# Altium PCB DCDC_Motherbord.PcbDoc
Units mm, origin at the board's own origin, x right, y up, seen from the top; angles counter-clockwise.
Board outline 50 x 50 mm, 2 copper layers (Top Layer, Bottom Layer); 3 components, 16 nets, 39 pads, 0 vias.
Unrouted connection lines stored in the file: 16.
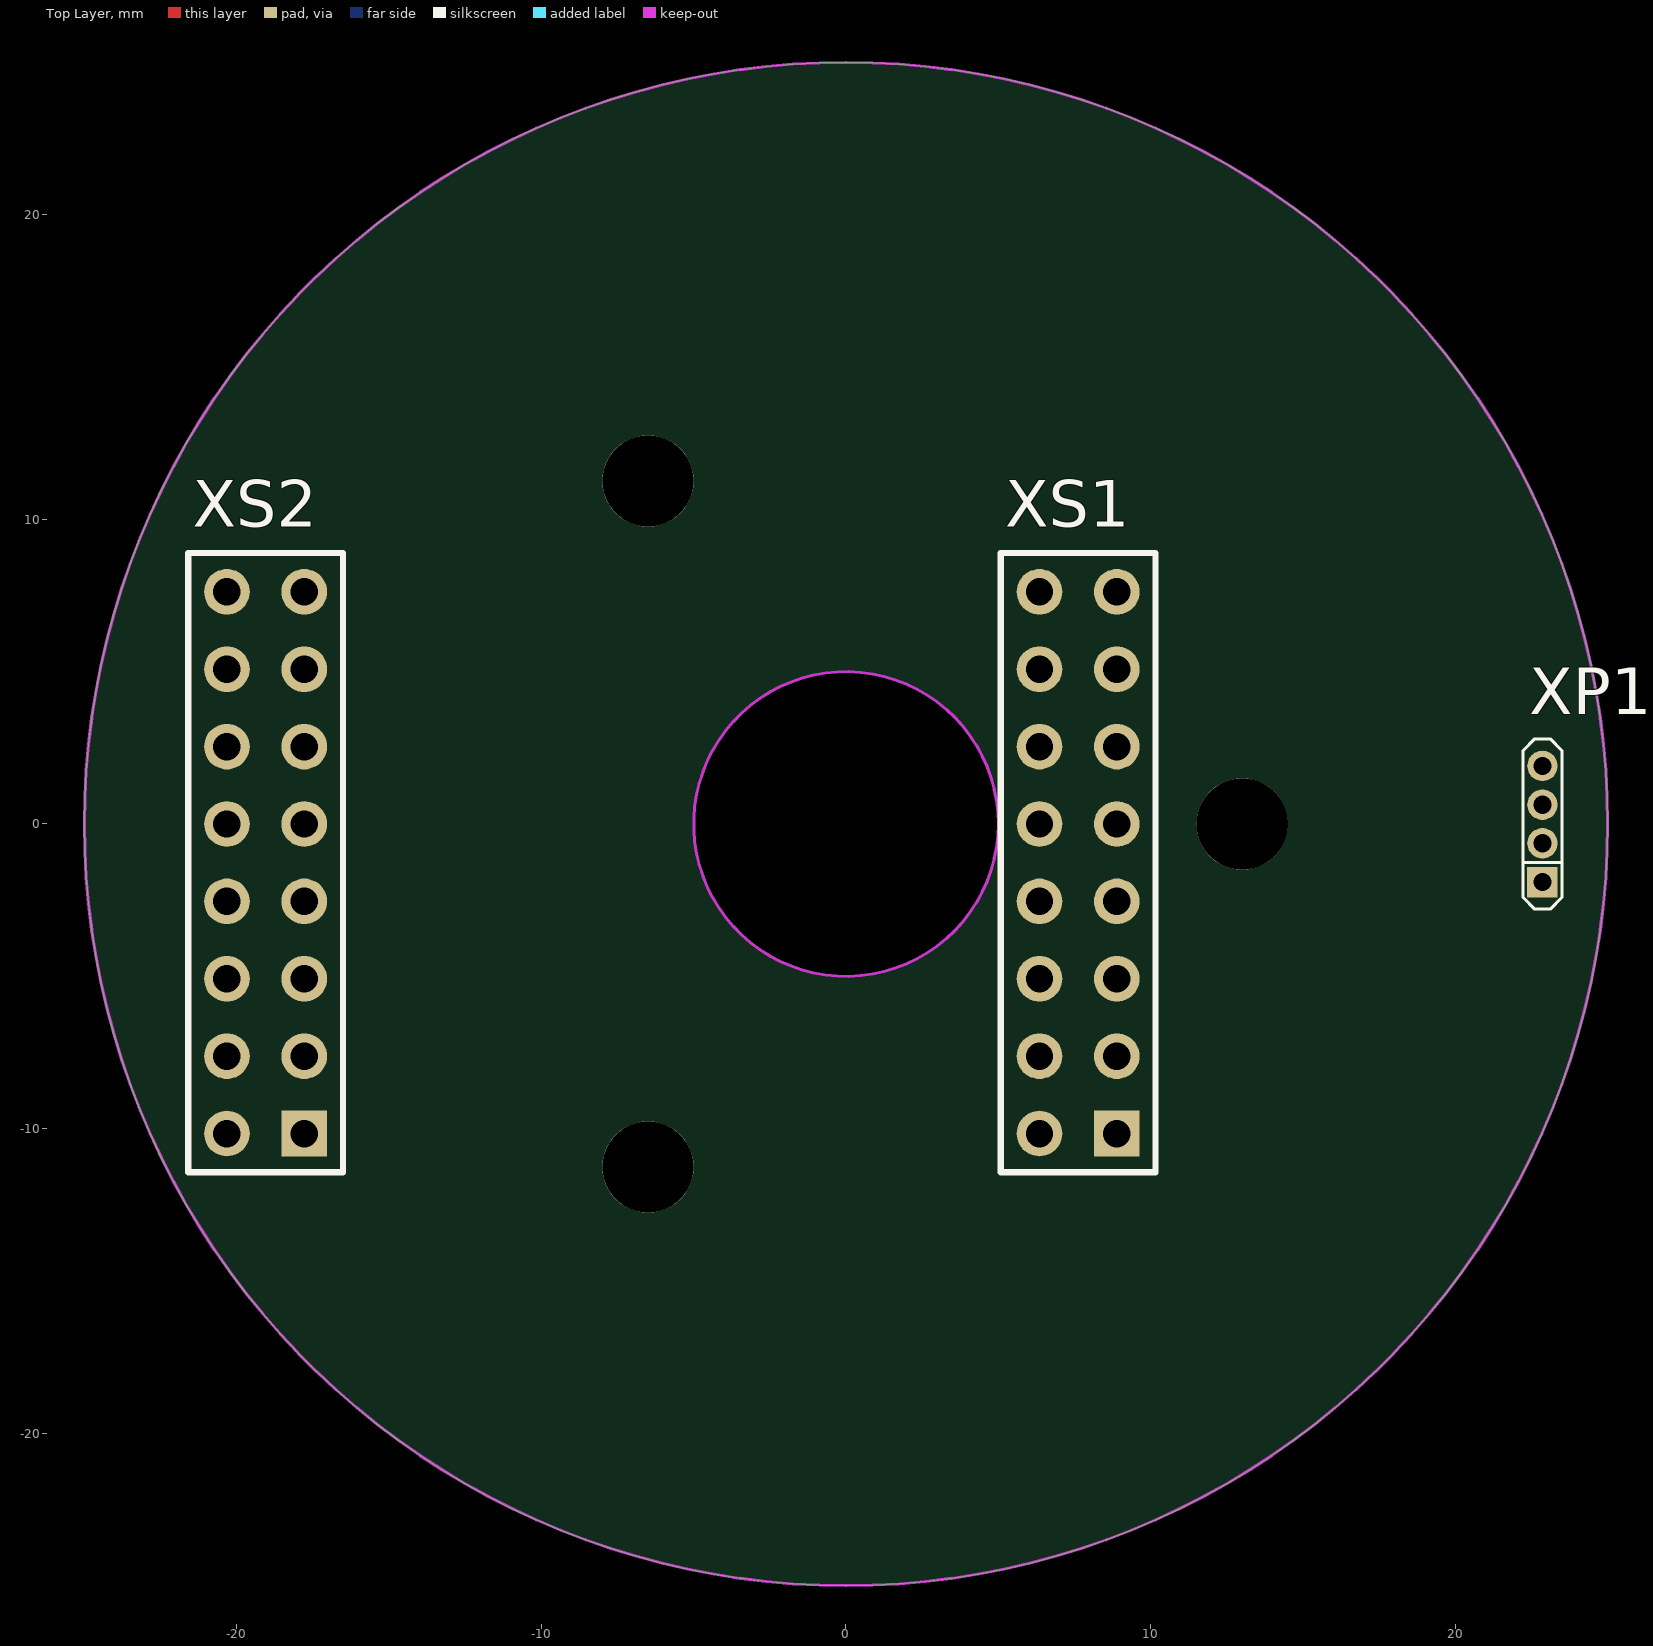
[diagram p0: Top Layer view]
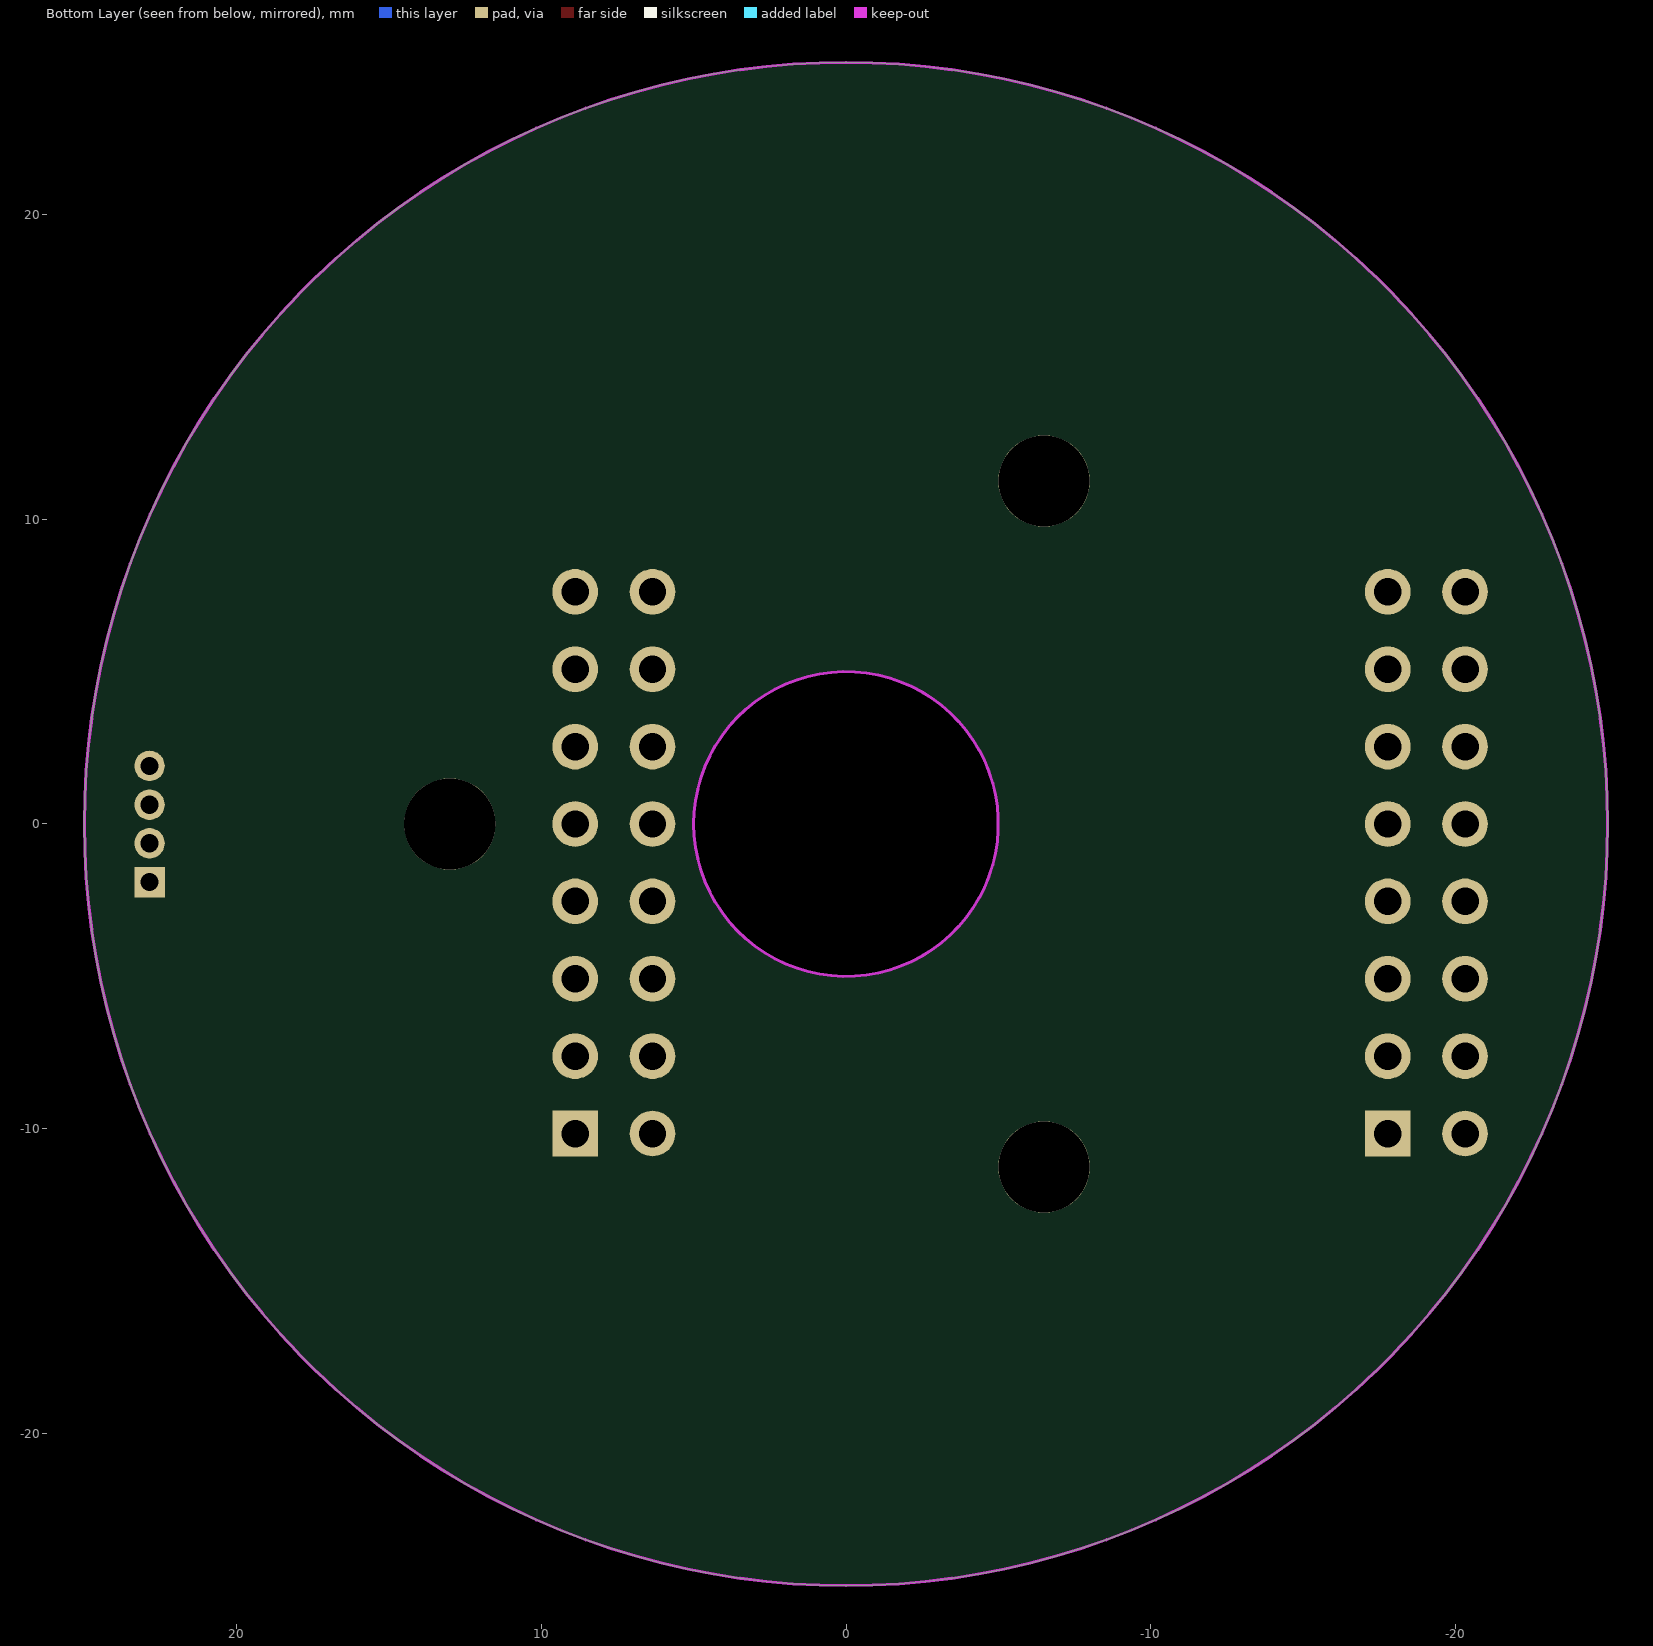
[diagram p1: Bottom Layer view, seen from below]

## Layer stack, top to bottom
Top Solder: solder mask 0.0102, Solder Resist, Dk 3.5
Top Layer: signal copper 0.0356
Dielectric 1: dielectric 0.32, FR-4, Dk 4.8
Bottom Layer: signal copper 0.0356
Bottom Solder: solder mask 0.0102, Solder Resist, Dk 3.5

## Board outline
-25,0 ccw(c0,0) 0,-25 ccw(c0,0) 25,0 ccw(c0,0) 0,25 ccw(c0,0)
cut-out: -5,0 ccw(c0,0) 0,-5 ccw(c0,0) 5,0 ccw(c0,0) 0,5 ccw(c0,0)

## Design rules (kind name [scope] priority, off if disabled: settings)
Clearance [All] p1: gap=0.254 ignorepadtopadclearanceinfootprint=FALSE except(0: Arc-Hole Track-Hole SMDPad-Hole THPad-Hole Via-Hole Fill-Hole Poly-Hole Region-Hole Text-Hole)
PolygonConnect [All] p1: connectstyle=Relief reliefconductorwidth=0.254 reliefentries=4 polygonreliefangle="90 Angle" airgapwidth=0.254
RoutingVias [All] p1: holewidth=0.711 width=1.27 viastyle="Through Hole" minholewidth=0.711 minwidth=1.27 maxholewidth=0.711 maxwidth=1.27
SolderMaskExpansion [All] p1: expansion=0.102 istentingtop=FALSE
Width [All] p1: maxlimit=0.254 minlimit=0.254 preferedwidth=0.254
30 further rules are at their usual default settings.

## Components (designator, comment, footprint, x,y, rotation, side; value= is the part's Value field where it differs from the comment)
XP1 "PLS1.27-4" PLLS1.27-4 22.86,-1.905 r0 top
XS1 "PBD-16" PBD-16-3D 8.89,-10.16 r90 top
XS2 "PBD-16" PBD-16-3D -17.78,-10.16 r90 top

## Footprints (in the part's own frame and the unit in brackets; to place one, negate y for a bottom-side part, rotate by r counter-clockwise, add the part's x,y. Pads: shape width x height; smd on the part's side, far side on the other; paste and mask are expansions set on the pad)
PBD-16-3D [mm] "Connector; Header; 8x2 Position"
  rect 1.5x1.5 hole 0.9: 1(0,0)
  round 1.5 hole 0.9: 2(0,2.54) 3(2.54,0) 4(2.54,2.54) 5(5.08,0) 6(5.08,2.54) 7(7.62,0) 8(7.62,2.54) 9(10.16,0) 10(10.16,2.54) 11(12.7,0) 12(12.7,2.54) 13(15.24,0) 14(15.24,2.54) 15(17.78,0) 16(17.78,2.54)
  silkscreen extent -1.27,-1.27 19.05,3.81, body extent -1.27,-1.27 19.05,3.81, height 8.5
PLLS1.27-4 [mm]
  rect 1x1 hole 0.6: 1(0,0)
  round 1 hole 0.6: 2(0,1.27) 3(0,2.54) 4(0,3.81)
  silkscreen extent -0.64,-0.89 0.64,4.7

## Part data
XS1 XS2: library part SH2-16G, "CONN RCPT 16POS 0.1 GOLD PCB", Digi-Key Part Number=ED3071-ND, Package="Socket 16POS 2.54mm", HelpURL=https://www.digikey.com/en/products/detail/on-shore-technology-inc/SH2-16G/2721215, Manufacturer Part Number=SH2-16G, Part Number=SH2-16G, Price$=0.20250
  XS1: System=Connector
XP1: Part Number=PLS1.27-4, System=Connector

## Free pads (board coordinates)
  round 3 hole 3: 0(-6.5,11.258) 1(-6.5,-11.258) 2(13,0)

## Nets (pads, with @x,y where several pads share a name; then routed paths per layer and width w, separated by ;. In a path a pad name is that pad's centre, name@x,y a point inside that pad or via, vN(x,y) a via of type N, cw(c..) or ccw(c..) an arc to the next point about the centre after c; other vN are vias at no path point)
A2: XS1.3 XS2.3
A3: XS1.4 XS2.4
A4: XS1.5 XS2.5
A5: XS1.6 XS2.6
A6: XS1.7 XS2.7
A7: XS1.8 XS2.8
A8: XS1.9 XS2.9
A9: XS1.10 XS2.10
A10: XS1.11 XS2.11
GND: XS1.12 XS2.12
NetXP1_1: XP1.1 XS2.13
NetXP1_2: XP1.2 XS2.14
NetXP1_3: XP1.3 XS2.15
NetXP1_4: XP1.4 XS2.16
SSS: XS1.2 XS2.2
VCC: XS1.1 XS2.1
pads on no net: XS1.13 XS1.14 XS1.15 XS1.16

## Keep-outs
Keep-Out Layer:
  circle w0.1: c0,0 r25
  circle w0.1: c0,0 r5

## Silkscreen, mask and mechanical layers (free items; w line width, h text height)
Dimensions:
  lines w0.15: 6.032,-10.477 6.667,-9.842 ; 6.032,-9.842 6.667,-10.477